# Altium PCB MTG_B_MAIN.PcbDoc (part 1 of 2)
Units mm, origin at the board's own origin, x right, y up, seen from the top; angles counter-clockwise.
Board outline 99.45 x 60.57 mm, 4 copper layers (Top Layer, Layer 1, Layer 2, Bottom Layer), stack 1.544 mm thick; 115 components, 96 nets, 460 pads, 131 vias.
Unrouted connection lines stored in the file: 2.
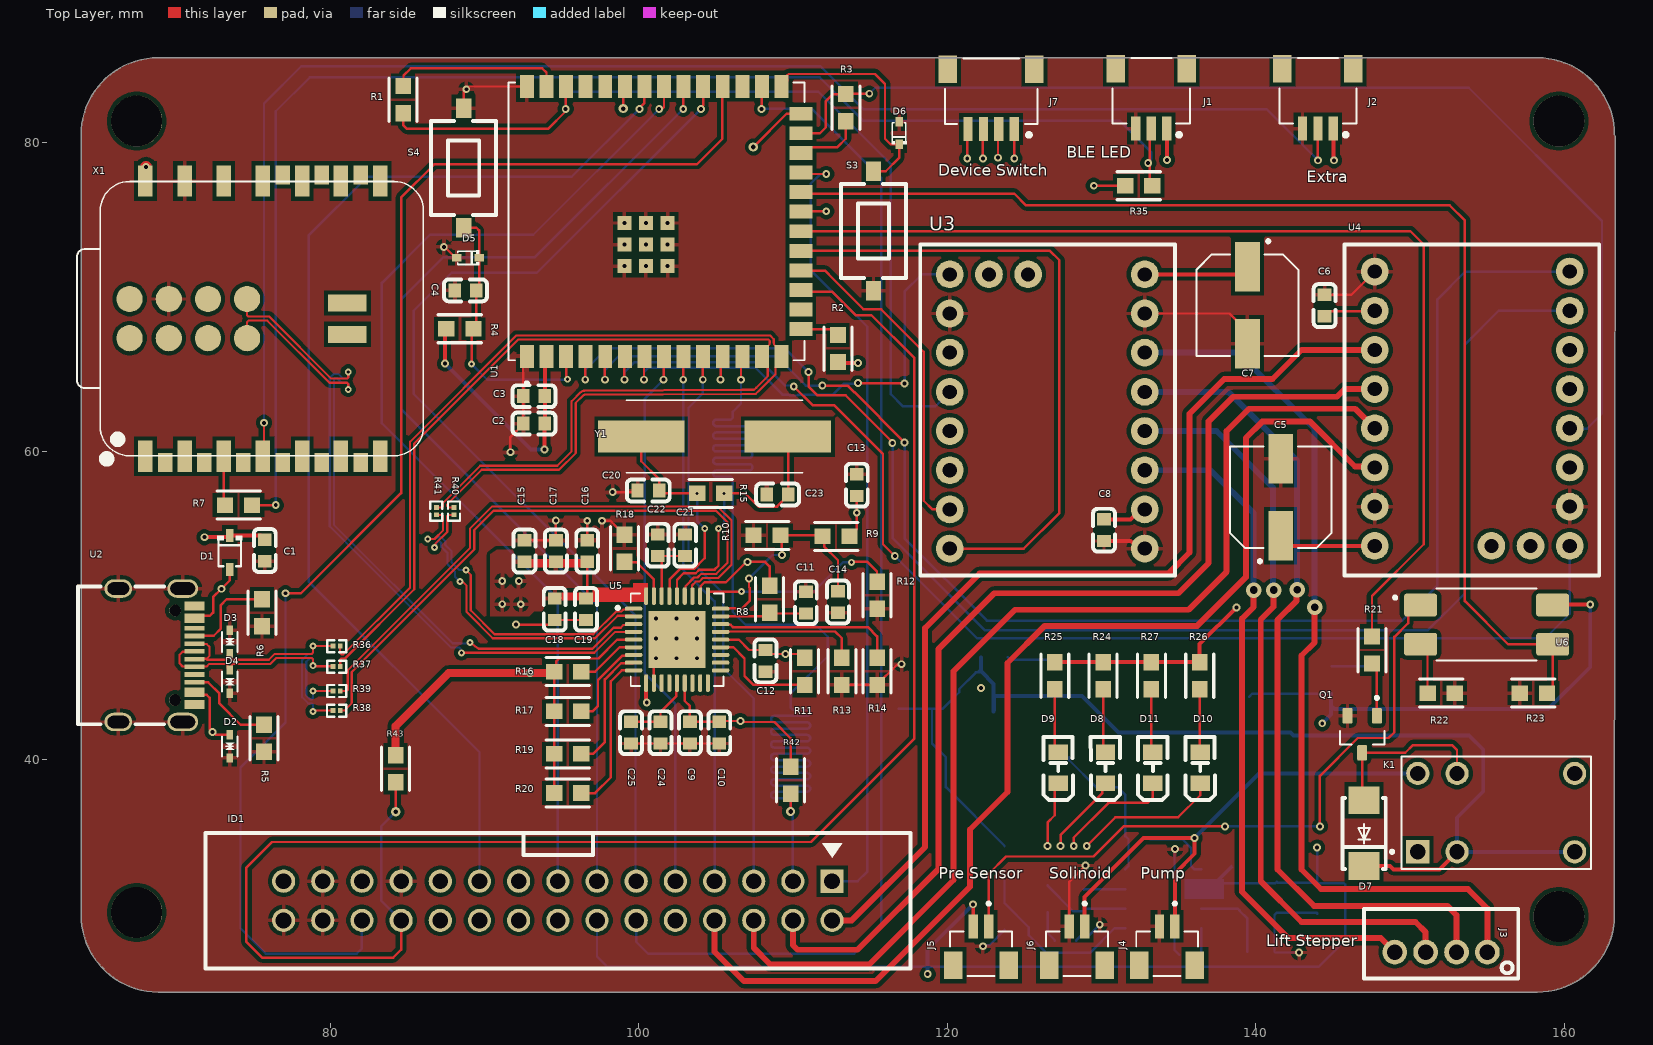
[diagram p0: Top Layer view]
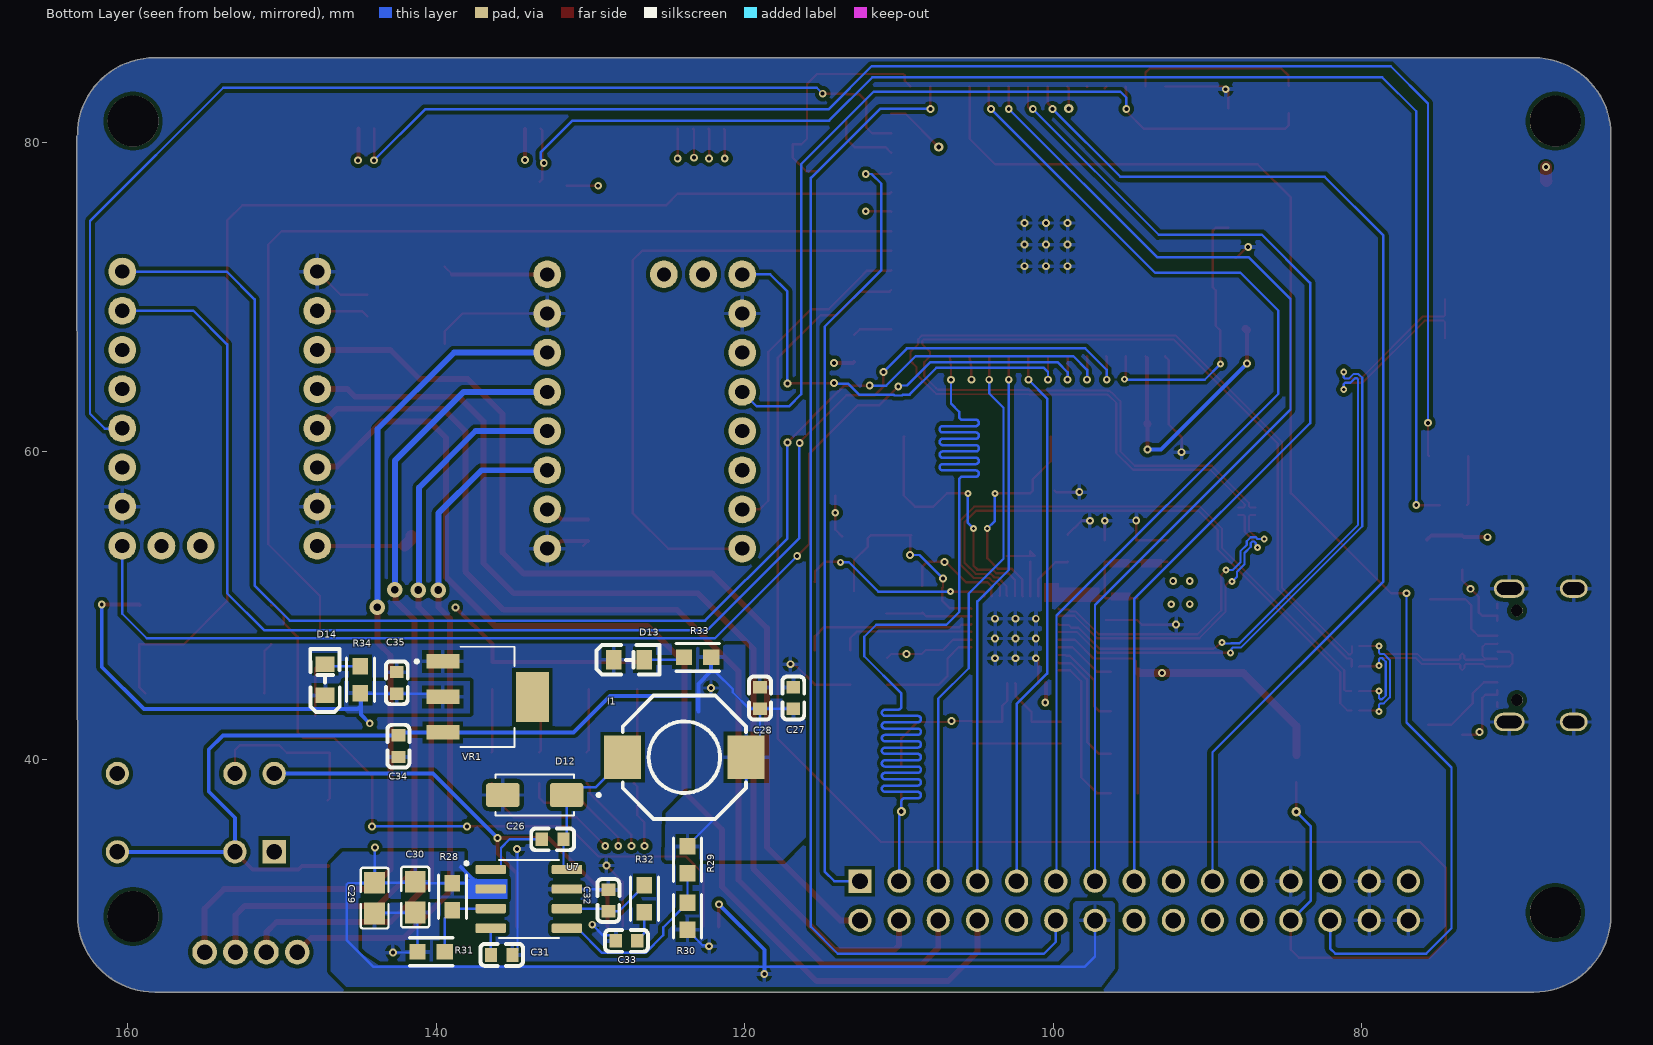
[diagram p1: Bottom Layer view, seen from below]
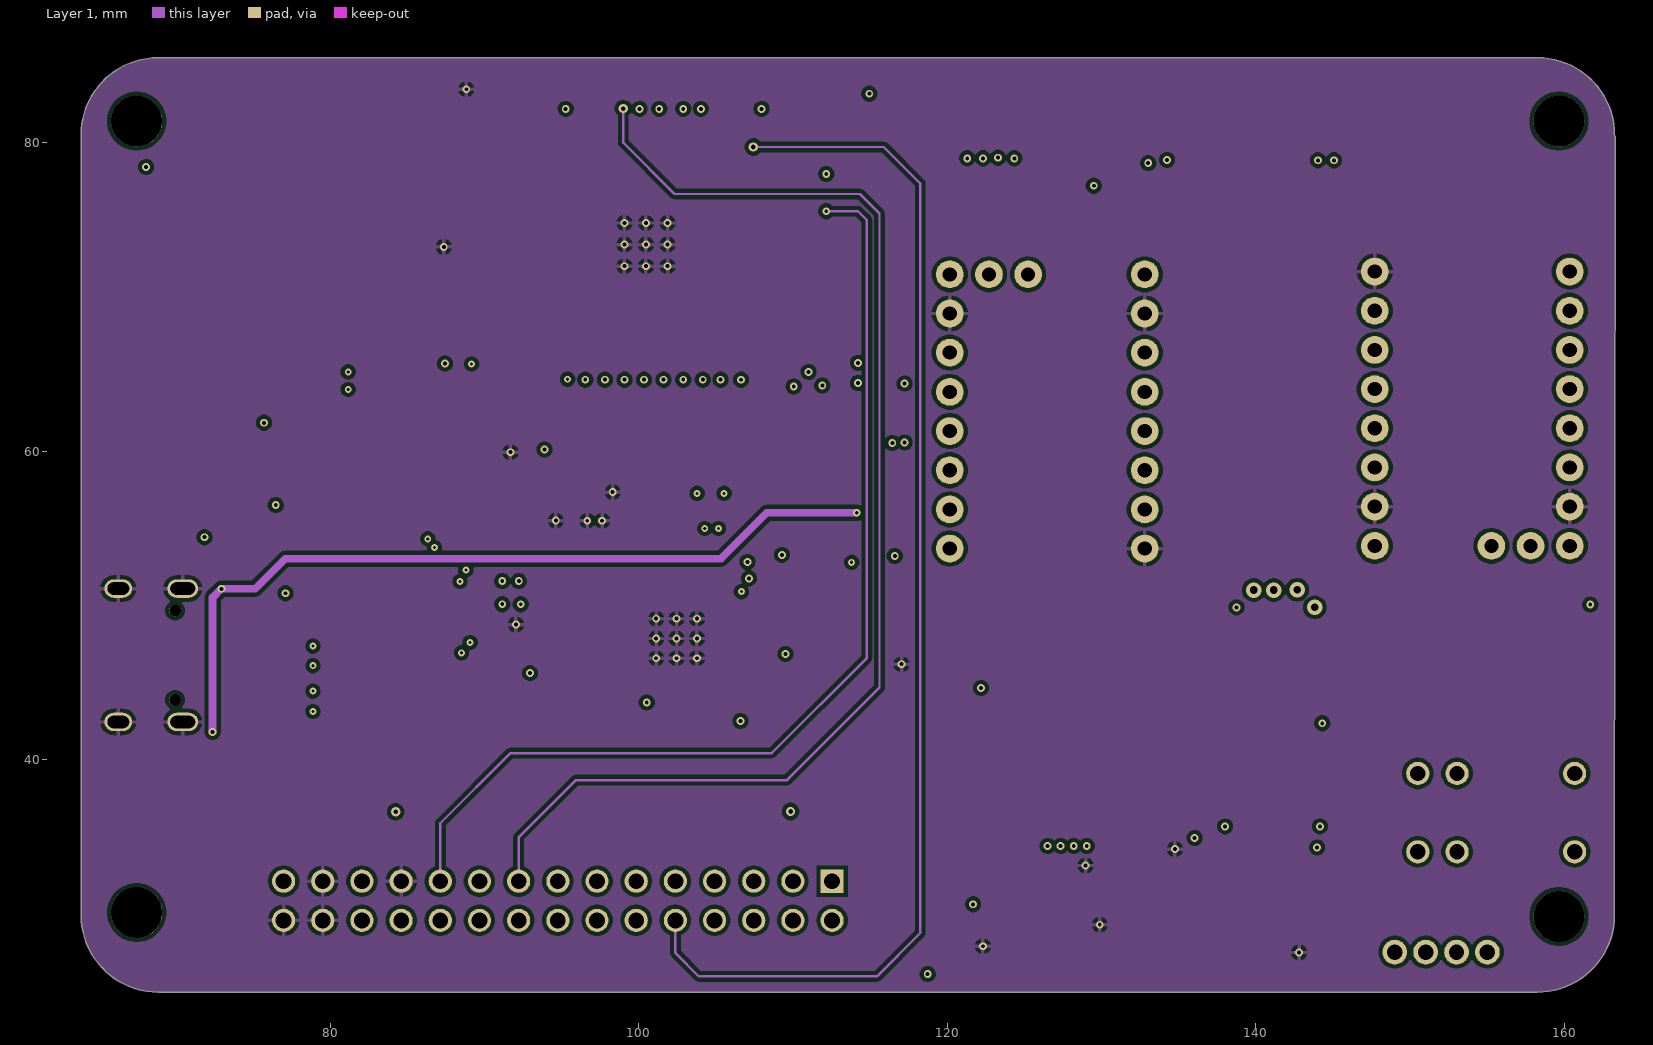
[diagram p2: Layer 1]
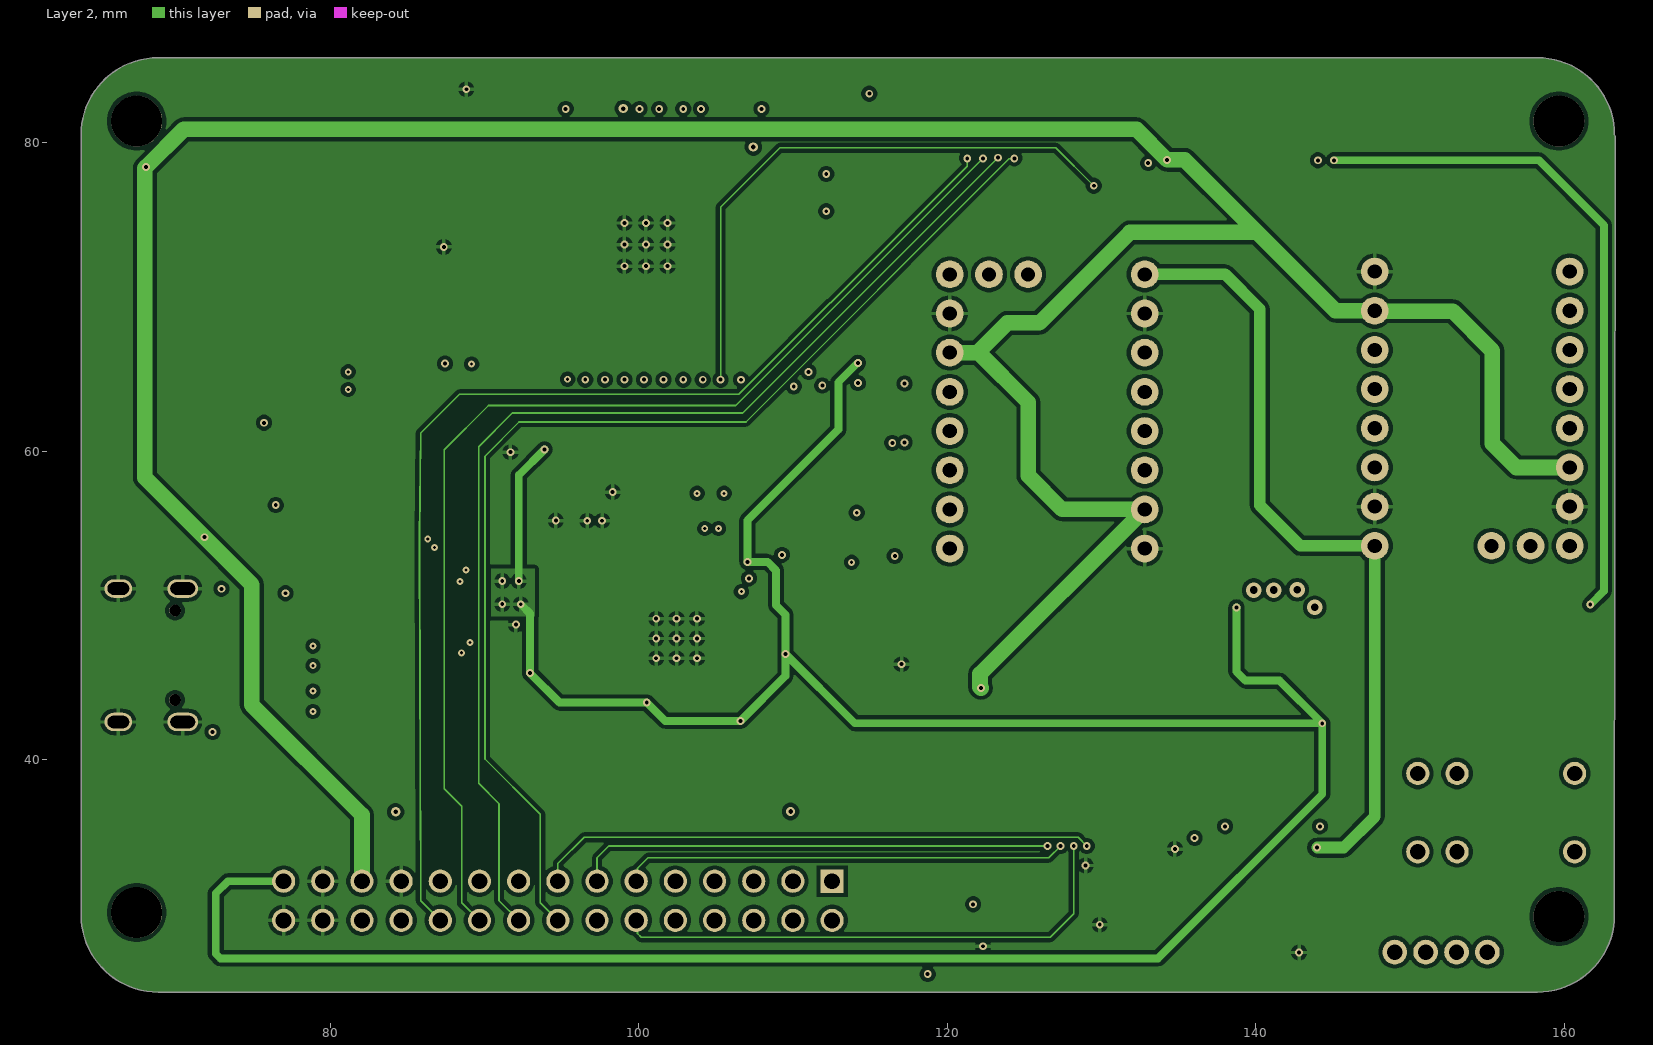
[diagram p3: Layer 2]
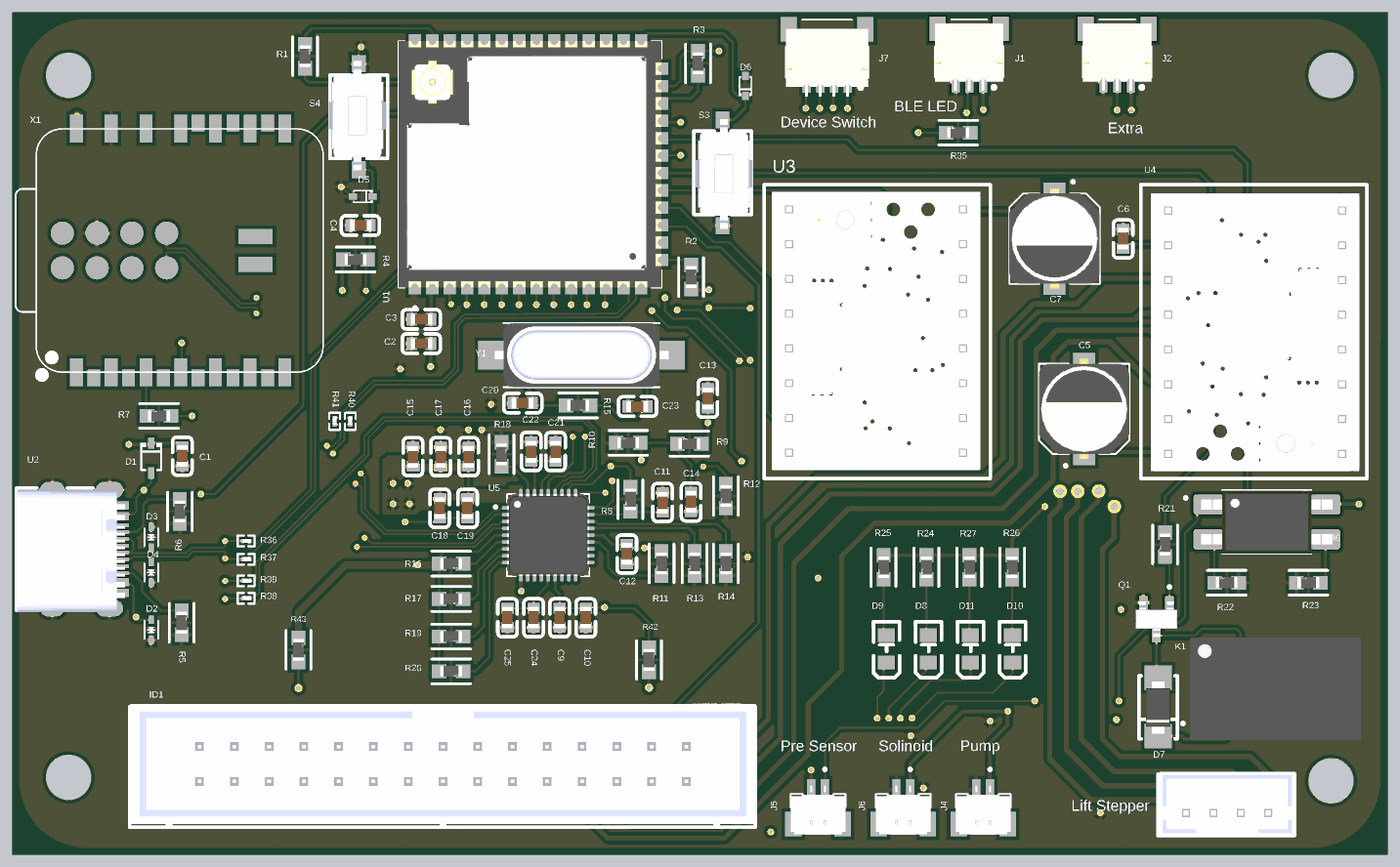
[diagram p5: 3D render of the assembled board from above, using the file's embedded part models]
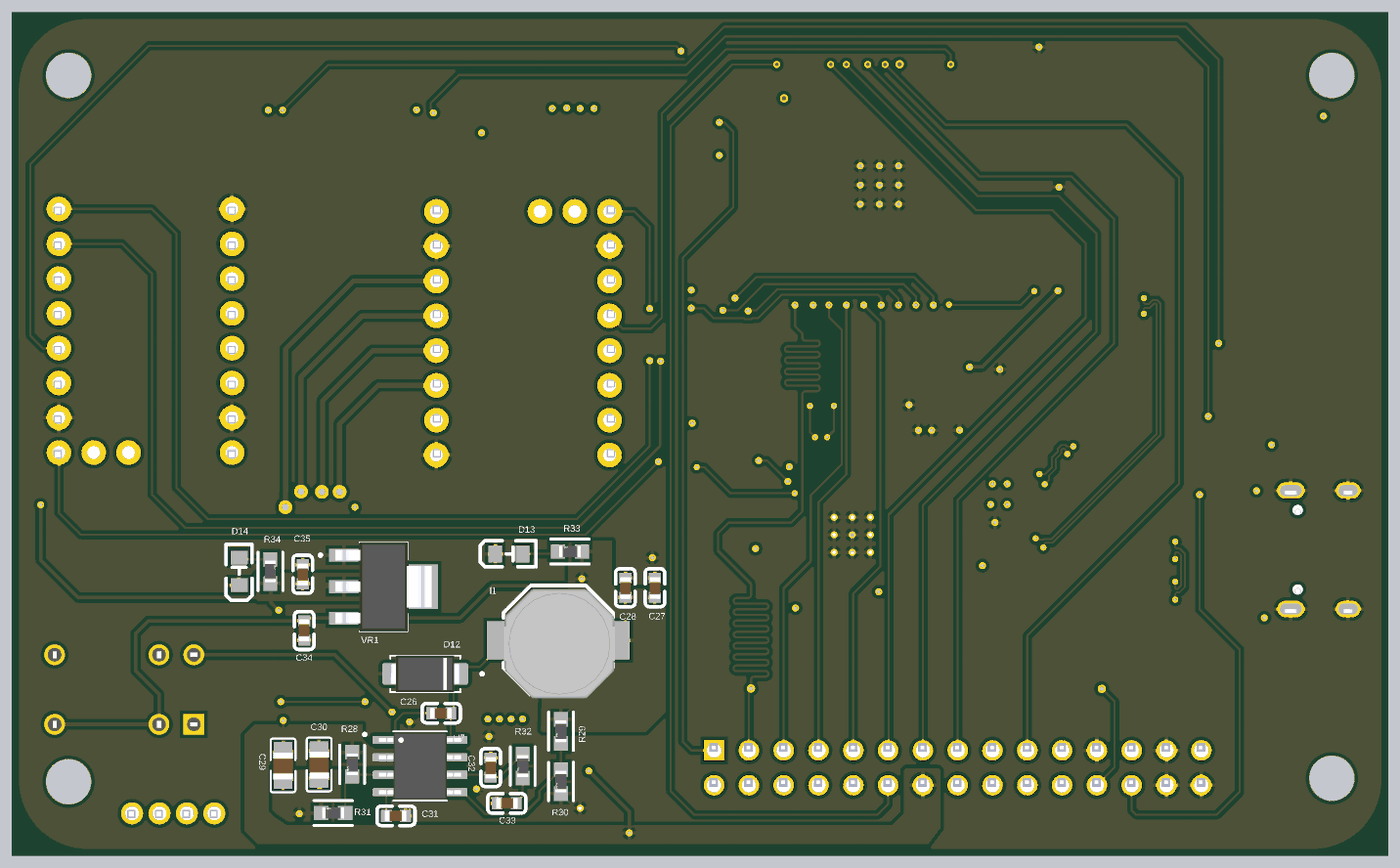
[diagram p6: 3D render of the assembled board from below, using the file's embedded part models]

## Layer stack, top to bottom
Top Solder: solder mask 0.0102, Solder Resist, Dk 3.5
Top Layer: signal copper 0.035
Dielectric 2: prepreg 0.092, PP-006, Dk 4.1
Layer 1: signal copper 0.03
Dielectric 1: dielectric 1.23, FR-4, Dk 4.8
Layer 2: signal copper 0.03
Dielectric 3: prepreg 0.092, PP-006, Dk 4.1
Bottom Layer: signal copper 0.035
Bottom Solder: solder mask 0.0102, Solder Resist, Dk 3.5

## Board outline
63.834,29.948 63.834,80.518 cw(c68.834,80.518) 68.834,85.518 158.242,85.518 cw(c158.242,80.518) 163.242,80.518 163.282,80.403 163.242,29.948 cw(c158.242,29.948) 158.242,24.948 68.834,24.948 cw(c68.834,29.948)

## Design rules (kind name [scope] priority, off if disabled: settings)
Clearance [All] p1: gap=0.254 ignorepadtopadclearanceinfootprint=FALSE except(0.127: Arc-Arc Arc-Track Track-Track)
DiffPairsRouting [InDifferentialPairClass('All Differential Pairs')] p1: maxlimit=0.127 minlimit=0.127 mostfreqgap=0.127 toplayer_minwidth=0.139 toplayer_maxwidth=0.139 toplayer_prefwidth=0.139 midlayer1_minwidth=0.078 midlayer1_maxwidth=0.078 midlayer1_prefwidth=0.078 midlayer2_minwidth=0.078 midlayer2_maxwidth=0.078 midlayer2_prefwidth=0.078 bottomlayer_minwidth=0.139 bottomlayer_maxwidth=0.139 bottomlayer_prefwidth=0.139 impedanceprofiledriven=TRUE impedanceprofileid={293B1E48-94D4-45EC-9236-5D6FF2A33685} impedanceprofilevalue=90.000000 maxuncoupledlength=12.7
MatchedLengths [InNetClass('I2C')] p1: tolerance=0 checknetsindiffpair=FALSE checkdiffpairvsdiffpair=TRUE checkxsignals=TRUE checkothers=TRUE
PolygonConnect [All] p1: connectstyle=Relief reliefconductorwidth=0.254 reliefentries=4 polygonreliefangle="90 Angle" airgapwidth=0.254
RoutingVias [All] p1: holewidth=0.711 width=1.27 viastyle="Through Hole" minholewidth=0.711 minwidth=1.27 maxholewidth=0.711 maxwidth=1.27
SolderMaskExpansion [All] p1: expansion=0 istentingtop=FALSE
SupplyNets "Schematic Supply Nets_4" [InNet('3V3')] p1: voltage=0.000
SupplyNets "Schematic Supply Nets_3" [InNet('VBUS')] p2: voltage=0.000
SupplyNets "Schematic Supply Nets_2" [InNet('19V')] p3: voltage=0.000
SupplyNets "Schematic Supply Nets_1" [InNet('5V')] p4: voltage=0.000
SupplyNets "Schematic Supply Nets" [InNet('GND')] p5: voltage=0.000
Width [All] p1: maxlimit=1.27 minlimit=0.108 preferedwidth=0.156 toplayer_minwidth=0.156 midlayer1_prefwidth=0.108 midlayer2_prefwidth=0.108 bottomlayer_minwidth=0.156 impedanceprofiledriven=TRUE impedanceprofileid={4305EF1B-C4E3-4A6E-B89B-675A5CBEDAC7} impedanceprofilevalue=50.000000 minimp=50.000000 maximp=50.000000 favimp=50.000000 checkconnectedcopper=TRUE
29 further rules are at their usual default settings.

## Classes and differential pairs
net class I2C: SCL SDA
component class XIAO_S3: J1 J2 R7 R35 X1
component class USB_HUB: C9 C10 C11 C12 C13 C14 C15 C16 C17 C18 C19 C20 C21 C22 C23 C24 C25 R8 R9 R10 R11 R12 R13 R14 R15 R16 R17 R18 R19 R20 U5 Y1
component class REALY_AND_PRESSURE: D7 J4 J5 J6 K1 Q1 R21 R22 R23 U6
component class Power: C26 C27 C28 C29 C30 C31 C32 C33 C34 C35 D12 D13 D14 l1 R28 R29 R30 R31 R32 R33 R34 U7 VR1
component class MOTOR_DRIVERS: C5 C6 C7 C8 J3 U3 U4
component class ESP32: C1 C2 C3 C4 D1 D2 D3 D4 D5 D6 R1 R2 R3 R4 R5 R6 R36 R37 R38 R39 R40 R41 R42 R43 S3 S4 U1 U2
component class CONNECTORS: D8 D9 D10 D11 ID1 J7 R24 R25 R26 R27
differential pair ESP1_D: +ESP1_D_P -ESP1_D_N
differential pair X_D: +X_D_P -X_D_N
differential pair HUB_D: +HUB_D_P -HUB_D_N
differential pair ESP_D: +ESP_D_P -ESP_D_N
differential pair D: +D_P -D_N

## Components (designator, comment, footprint, x,y, rotation, side; value= is the part's Value field where it differs from the comment)
C1 "100nF" "CAP 0603" 75.819,53.594 r90 top
C2 "10uF" "CAP 0603" 93.218,61.722 r0 top
C3 "100nF" "CAP 0603" 93.218,63.5 r0 top
C4 "100nF" "CAP 0603" 88.773,70.358 r0 top
C5 "100uF" CAP_EEEFTH101XAP 141.605,57.023 r90 top
C6 "100nF" "CAP 0603" 144.526,69.469 r90 top
C7 "100uF" CAP_EEEFTH101XAP 139.446,69.469 r270 top
C8 "100nF" "CAP 0603" 130.073,54.864 r270 top
C9 "4.7uF" "CAP 0603" 103.378,41.783 r90 top
C10 "100nF" "CAP 0603" 105.283,41.783 r90 top
C11 "100nF" "CAP 0603" 110.744,50.165 r270 top
C12 "100nF" "CAP 0603" 108.279,46.442 r90 top
C13 "1uF" "CAP 0603" 114.046,57.785 r270 top
C14 "1nF" "CAP 0603" 112.978,50.249 r90 top
C15 "100nF" "CAP 0603" 92.508,53.51 r270 top
C16 "100nF" "CAP 0603" 96.572,53.51 r270 top
C17 "100nF" "CAP 0603" 94.54,53.51 r270 top
C18 "100nF" "CAP 0603" 94.615,49.784 r90 top
C19 "1uF" "CAP 0603" 96.647,49.784 r90 top
C20 "18uF" "CAP 0603" 100.584,57.531 r180 top
C21 "100nF" "CAP 0603" 102.922,53.891 r270 top
C22 "1uF" "CAP 0603" 101.144,53.891 r270 top
C23 "18uF" "CAP 0603" 108.966,57.277 r180 top
C24 "100nF" "CAP 0603" 101.473,41.783 r90 top
C25 "1uF" "CAP 0603" 99.568,41.783 r90 top
C26 "100nF" "CAP 0603" 132.461,34.925 r0 bottom
C27 "47uF" "CAP 0603" 116.915,43.985 r270 bottom
C28 "47uF" "CAP 0603" 119.074,43.982 r270 bottom
C29 "10uF" "CAP 0805" 144.018,30.988 r90 bottom
C30 "10uF" "CAP 0805" 141.387,31.055 r90 bottom
C31 "10nF" "CAP 0603" 135.763,27.432 r0 bottom
C32 "10pF" "CAP 0603" 128.905,30.861 r270 bottom
C33 "1nF" "CAP 0603" 127.635,28.194 r180 bottom
C34 "100nF" "CAP 0603" 142.367,40.906 r90 bottom
C35 "100nF" "CAP 0603" 142.621,44.97 r270 bottom
D1 "Diode" Dioad 73.533,53.467 r270 top
D2 "ESD" ESD 73.546,41.021 r270 top
D3 "ESD" ESD 73.406,47.498 r90 top
D4 "ESD" ESD 73.546,45.212 r270 top
D5 "SINGAL ESD" "Singal ESD" 88.773,72.517 r180 top
D6 "SINGAL ESD" "Singal ESD" 116.84,80.772 r90 top
D7 "Diode" "RELAY DIODE" 147.066,35.306 r90 top
D8 "LED" LED 130.154,39.207 r90 top
D9 "LED" LED 127.085,39.207 r90 top
D10 "LED" LED 136.293,39.207 r90 top
D11 "LED" LED 133.224,39.207 r90 top
D12 "B340A-E3/61T" DIOM5126X229N 133.604,37.719 r0 bottom
D13 "LED" LED 127.774,46.573 r180 bottom
D14 "LED" LED 147.284,44.914 r90 bottom
ID1 "IDC 24PIN CONNECTOR" "IDC 30 PIN" 94.741,32.094 r180 top
J1 "SM03B-SRSS-TB(LF)(SN)" JST_SM03B-SRSS-TB(LF)(SN) 133.214,80.924 r180 top
J2 "SM03B-SRSS-TB(LF)(SN)" JST_SM03B-SRSS-TB(LF)(SN) 144.018,80.924 r180 top
J3 "SM04B-SRSS-TB(LF)(SN)" CONN-TH_B4B-PH-K-S 152.002,27.537 r0 top
J4 "SM02B-SRSS-TB(LF)(SN)" JST_BM02B-SRSS-TB(LF)(SN) 134.239,27.432 r180 top
J5 "SM02B-SRSS-TB(LF)(SN)" JST_BM02B-SRSS-TB(LF)(SN) 122.174,27.432 r180 top
J6 "SM02B-SRSS-TB(LF)(SN)" JST_BM02B-SRSS-TB(LF)(SN) 128.397,27.432 r180 top
J7 "SM04B-SRSS-TB(LF)(SN)" JST_SM04B-SRSS-TB(LF)(SN) 122.833,80.899 r180 top
K1 "G5V-1_DC5" RELAY_G5V-1_DC5 155.575,36.576 r0 top
l1 "10uH" INDUCTOR 123.825,40.132 r180 bottom
Q1 "MMBT3904" TRANS_MMBT3904 146.887,41.656 r270 top
R1 "1K" "RES 0603" 84.709,82.804 r90 top
R2 "10K" "RES 0603" 112.903,66.663 r90 top
R3 "1K" "RES 0603" 113.411,82.284 r90 top
R4 "5.1K" "RES 0603" 88.392,67.945 r180 top
R5 "5.1K" "RES 0603" 75.692,41.402 r90 top
R6 "5.1K" "RES 0603" 75.565,49.53 r90 top
R7 "0R" "RES 0603" 74.041,56.515 r180 top
R8 "100K" "RES 0603" 108.47,50.419 r270 top
R9 "100K" "RES 0603" 112.776,54.483 r180 top
R10 "100K" "RES 0603" 108.305,54.547 r180 top
R11 "100K" "RES 0603" 110.744,45.732 r270 top
R12 "100K" "RES 0603" 115.443,50.661 r270 top
R13 "100K" "RES 0603" 113.157,45.732 r270 top
R14 "100K" "RES 0603" 115.443,45.732 r270 top
R15 "1M" "RES 0603" 104.648,57.277 r0 top
R16 "10K" "RES 0603" 95.377,45.72 r0 top
R17 "10K" "RES 0603" 95.377,43.138 r0 top
R18 "12K" "RES 0603" 99.06,53.709 r90 top
R19 "10K" "RES 0603" 95.377,40.386 r0 top
R20 "10K" "RES 0603" 95.377,37.846 r0 top
R21 "10K" "RES 0603" 147.522,47.117 r270 top
R22 "1K" "RES 0603" 152.019,44.323 r180 top
R23 "10K" "RES 0603" 157.988,44.323 r180 top
R24 "220R" "RES 0603" 130.09,45.454 r270 top
R25 "220R" "RES 0603" 126.958,45.454 r270 top
R26 "220R" "RES 0603" 136.356,45.454 r270 top
R27 "220R" "RES 0603" 133.223,45.454 r270 top
R28 "169K" "RES 0603" 138.938,31.115 r270 bottom
R29 "10.2K" "RES 0603" 123.698,33.528 r270 bottom
R30 "1.96K" "RES 0603" 123.698,29.857 r270 bottom
R31 "22.6K" "RES 0603" 140.323,27.559 r0 bottom
R32 "32.4K" "RES 0603" 126.492,30.988 r270 bottom
R33 "470R" "RES 0603" 123.043,46.646 r0 bottom
R34 "220R" "RES 0603" 144.907,45.2 r90 bottom
R35 "0R" "RES 0603" 132.41,77.216 r180 top
R36 "0R" RES_0201 80.391,47.361 r0 top
R37 "0R" RES_0201 80.391,46.026 r0 top
R38 "0R" RES_0201 80.391,43.18 r0 top
R39 "0R" RES_0201 80.391,44.45 r0 top
R40 "0R" RES_0201 88.021,56.109 r90 top
R41 "0R" RES_0201 86.878,56.109 r90 top
R42 "1K" "RES 0603" 109.83,38.684 r90 top
R43 "1K" "RES 0603" 84.226,39.421 r90 top
S3 "Push button" "TACTICAL SWITCH" 115.189,74.168 r90 top
S4 "Push button" "TACTICAL SWITCH" 88.646,78.486 r270 top
U1 "ESP32-S3-WROOM-1U-N8R2" XCVR_ESP32-S3-WROOM-1U-N8R2 101.144,74.903 r90 top
U2 "USB C" TYPE-C 67.691,46.863 r270 top
U3 "MOTOR DRIVER" "MOTOR DRIVER" 126.42,62.586 r0 top
U4 "MOTOR DRIVER" "MOTOR DRIVER" 154.072,62.763 r180 top
U5 "USB2514BI-AEZG" QFN50P600X600X100-37N 102.469,47.796 r0 top
U6 "PC817X4NIP1B" SOIC254P960X420-4N 154.952,48.764 r0 top
U7 "TPS54331DR" SOIC127P599X175-8N 133.985,30.988 r180 bottom
VR1 "LM1117IMPX-3.3/NOPB" VREG_LM1117IMPX-3.3/NOPB 136.652,44.081 r180 bottom
X1 "XIAO_S3_PLUS" XIAO_S3_PLUS 75.869,69.366 r180 top
Y1 "ABLS-24.000MHZ-B4-T" XTAL_ABLS-24.000MHZ-B4-T 104.902,60.96 r180 top

## Footprints (in the part's own frame and the unit in brackets; to place one, negate y for a bottom-side part, rotate by r counter-clockwise, add the part's x,y. Pads: shape width x height; smd on the part's side, far side on the other; paste and mask are expansions set on the pad)
"CAP 0603" [mm]
  rect 0.8x0.9 smd paste+0 mask+0.051: 1(-0.722,0.075) 2(0.678,0.075)
  silkscreen extent -1.41,-0.64 1.37,0.79, body extent -0.8,-0.32 0.8,0.48, height 0.78
"CAP 0805" [mm]
  rect 1.41x1.35 smd paste-100 mask+0.051: 1(-0.956,-0.036) 2(1.044,-0.036)
  silkscreen extent -1.92,-0.94 2.01,0.87, body extent -1,-0.76 1,0.69, height 1.26
CAP_EEEFTH101XAP [mm]
  rect 3.2x1.6 smd: 1(-2.5,0) 2(2.5,0)
  silkscreen extent -4.25,-3.3 3.3,3.3, body extent -3.65,-3.3 3.65,3.3, height 7.7
CONN-TH_B4B-PH-K-S [mm]
  round 1.6 hole 1: 1(3,0) 2(1,0) 3(-1,0) 4(-3,0)
  silkscreen extent -5,-1.7 5,2.8, body extent -4.9,-1.74 5,2.96, height 6.1
Dioad [mm]
  rect 0.845x0.455 smd paste+0 mask+0.051: 1(-1.066,-0.061) 2(1.129,-0.061)
  silkscreen extent -1.07,-0.86 0.91,0.74
DIOM5126X229N [mm]
  rrect25% 2.17x1.57 smd: A(2.065,0) C(-2.065,0)
  silkscreen extent -4.25,-1.33 2.55,1.33, body extent -2.55,-1.33 2.55,1.33, height 2.29
ESD [mm]
  rect 0.6x0.4 smd paste+0 mask+0.051: 1(-0.604,-0.07) 2(0.896,-0.07)
  silkscreen extent -0.5,-0.57 0.8,0.43
"IDC 30 PIN" [mm]
  rect 1.5x1.5 hole 1.02 paste-2539.97 mask+0.05: 1(-17.781,-0.037)
  round 1.5 hole 1.02 paste-2539.97 mask+0.05: 2(-17.781,2.503) 3(-15.241,-0.037) 4(-15.241,2.503) 5(-12.701,-0.037) 6(-12.701,2.503) 7(-10.161,-0.037) 8(-10.161,2.503) 9(-7.621,-0.037) 10(-7.621,2.503) 11(-5.081,-0.037) 12(-5.081,2.503) 13(-2.541,-0.037) 14(-2.541,2.503) 15(-0.001,-0.037) 16(-0.001,2.503) 17(2.539,-0.037) 18(2.539,2.503) 19(5.079,-0.037) 20(5.079,2.503) 21(7.619,-0.037) 22(7.619,2.503) 23(10.159,-0.037) 24(10.159,2.503) 25(12.699,-0.037) 26(12.699,2.503) 27(15.239,-0.037) 28(15.239,2.503) 29(17.779,-0.037) 30(17.779,2.503)
  silkscreen extent -22.85,-3.17 22.85,5.63, body extent -22.89,-3.39 22.81,5.52, height 9.6
INDUCTOR [mm]
  rect 2.4x2.8 smd paste+0 mask+0.051: 1(-4.073,0.038) 2(3.927,0.038)
  silkscreen extent -4.07,-3.96 3.93,4.04, body extent -4.03,-4.22 4.07,3.79, height 3.1
JST_BM02B-SRSS-TB(LF)(SN) [mm]
  rect 0.6x1.55 smd: 1(-0.5,-1.775) 2(0.5,-1.775)
  rect 1.2x1.8 smd: S1(-1.8,0.75) S2(1.8,0.75)
  silkscreen extent -2,-3.35 2,1.45, body extent -2,-2.1 2,1.5, height 4.25
JST_SM03B-SRSS-TB(LF)(SN) [mm]
  rect 0.6x1.55 smd paste+0 mask+0.102: 1(-1,0) 2(0,0) 3(1,0)
  rect 1.2x1.8 smd paste+0 mask+0.102: S1(-2.3,-3.875) S2(2.3,-3.875)
  silkscreen extent -2.5,-4.57 2.5,0.5, body extent -2.5,-4.28 2.5,0.67, height 2.92
JST_SM04B-SRSS-TB(LF)(SN) [mm]
  rect 0.6x1.55 smd: 1(-1.5,0) 2(-0.5,0) 3(0.5,0) 4(1.5,0)
  rect 1.2x1.8 smd: S1(-2.8,-3.875) S2(2.8,-3.875)
  silkscreen extent -3,-4.57 3,0.48, body extent -3,-3.9 3,1.05, height 2.93
LED [mm]
  rect 1x1.25 smd paste+0 mask+0.051: 1(-0.718,-0.091) 2(1.282,-0.091)
  silkscreen extent -1.82,-1.04 2.26,0.87
"MOTOR DRIVER" [mm]
  round 1.8 hole 0.914 paste-2539.97 mask+0.051: 1(6.371,-8.89) 2(6.371,-6.35) 3(6.371,-3.81) 4(6.371,-1.27) 5(6.371,1.27) 6(6.371,3.81) 7(6.371,6.35) 8(6.371,8.89) 9(-6.269,8.89) 10(-6.269,6.35) 11(-6.269,3.81) 12(-6.269,1.27) 13(-6.269,-1.27) 14(-6.269,-3.81) 15(-6.269,-6.35) 16(-6.269,-8.89) 17(-1.189,8.89) 18(-3.729,8.89)
  silkscreen extent -8.18,-10.64 8.33,10.82, body extent -7.64,-10.03 7.6,10.29, height 11.3
QFN50P600X600X100-37N [mm]
  rrect70% 1.13x0.26 smd: 1(-2.82,2) 2(-2.82,1.5) 3(-2.82,1) 4(-2.82,0.5) 5(-2.82,0) 6(-2.82,-0.5) 7(-2.82,-1) 8(-2.82,-1.5) 9(-2.82,-2) 19(2.82,-2) 20(2.82,-1.5) 21(2.82,-1) 22(2.82,-0.5) 23(2.82,0) 24(2.82,0.5) 25(2.82,1) 26(2.82,1.5) 27(2.82,2)
  rrect70% 0.26x1.13 smd: 10(-2,-2.82) 11(-1.5,-2.82) 12(-1,-2.82) 13(-0.5,-2.82) 14(0,-2.82) 15(0.5,-2.82) 16(1,-2.82) 17(1.5,-2.82) 18(2,-2.82) 28(2,2.82) 29(1.5,2.82) 30(1,2.82) 31(0.5,2.82) 32(0,2.82) 33(-0.5,2.82) 34(-1,2.82) 35(-1.5,2.82) 36(-2,2.82)
  rect 3.7x3.7 smd paste-0.677: 37(0,0)
  silkscreen extent -3.94,-3 3,3, body extent -3,-3 3,3, height 1
"RELAY DIODE" [mm]
  rect 1.8x2 smd paste+0 mask+0.05: 1(-2.188,0.054) 2(2.071,0.054)
  silkscreen extent -2.39,-1.35 2.21,1.45, body extent -2,-0.85 1.8,0.95, height 1.31
RELAY_G5V-1_DC5 [mm]
  rect 1.508x1.508 / inner round 1.508 / far side rect 1.508x1.508 hole 1: 1(-5.08,-2.54)
  round 1.508 hole 1: 2(-2.54,-2.54) 5(5.08,-2.54) 6(5.08,2.54) 9(-2.54,2.54) 10(-5.08,2.54)
  silkscreen extent -6.85,-3.65 6.15,3.65, body extent -6.25,-3.75 6.25,3.75, height 10
"RES 0603" [mm]
  rect 1.059x1.012 smd paste+0 mask+0: 1(-0.877,0) 2(0.877,0)
  silkscreen extent -1.41,-0.91 1.41,0.91, body extent -1.91,-1.01 1.91,1.01, height 0.25
RES_0201 [mm]
  rect 0.303x0.324 smd paste-100 mask+0.051: 1(-0.229,0.01) 2(0.254,0.01)
  silkscreen extent -0.61,-0.38 0.63,0.4, body extent -0.24,-0.13 0.36,0.17, height 0.24
"Singal ESD" [mil]
  rect 24x19 smd: 1(-34,-1) 2(23,-1)
  silkscreen extent -35,-20 20,18
SOIC127P599X175-8N [mm]
  rrect25% 1.97x0.6 smd: 1(-2.47,1.905) 2(-2.47,0.635) 3(-2.47,-0.635) 4(-2.47,-1.905) 5(2.47,-1.905) 6(2.47,-0.635) 7(2.47,0.635) 8(2.47,1.905)
  silkscreen extent -4.14,-2.52 1.95,2.52, body extent -3,-2.45 3,2.45, height 1.75
SOIC254P960X420-4N [mm]
  rrect25% 2.15x1.48 smd paste+0 mask+0.102: 1(-4.28,1.27) 2(-4.28,-1.27) 3(4.28,-1.27) 4(4.28,1.27)
  silkscreen extent -6.03,-2.33 3.25,2.33, body extent -4.8,-2.3 4.8,2.3, height 4.2
"TACTICAL SWITCH" [mm]
  rect 1.25x1 smd paste+0 mask+0.051: 1(-3.761,-0.015) 2(3.989,-0.015)
  silkscreen extent -2.94,-2.11 3.16,2.09, body extent -3.97,-2.21 4.03,1.99, height 2.55
TRANS_MMBT3904 [mm]
  rrect25% 1x0.65 smd paste+0 mask+0.102: 1(-1.2,0.95) 2(-1.2,-0.95) 3(1.2,0)
  silkscreen extent -2.46,-1.45 0.65,1.45, body extent -1.3,-1.52 1.3,1.52, height 1.3
TYPE-C [mm]
  oval 1.2x2 hole 0.8 slot 1.6 at 90 deg paste-2539.97 mask+0.051: 0(-4.241,2.736) 1(4.409,2.736)
  oval 1.2x1.8 hole 0.8 slot 1.4 at 90 deg paste-2539.97 mask+0.051: 2(4.409,-1.444) 3(-4.241,-1.444)
  rect 0.3x1.3 smd paste-100 mask+0.051: A1(-3.266,3.504) A4(-2.466,3.504) A5(-1.166,3.504) A6(-0.166,3.504) A7(0.334,3.504) A8(1.334,3.504) A9(2.634,3.504) A12(3.434,3.504) B1(3.134,3.504) B4(2.334,3.504) B5(1.834,3.504) B6(0.834,3.504) B7(-0.666,3.504) B8(-1.666,3.504) B9(-2.166,3.504) B12(-2.966,3.504)
  round 0.75 hole 0.75 unplated paste-2539.97: ""(-2.816,2.236) ""(2.984,2.236)
  silkscreen extent -4.38,-4.06 4.56,1.52, body extent -4.24,-4.02 4.7,3.88, height 3.3
VREG_LM1117IMPX-3.3/NOPB [mm]
  rect 2.15x0.95 smd: 1(-2.9,2.3) 2(-2.9,0) 3(-2.9,-2.3)
  rect 2.15x3.25 smd: 4(2.9,0)
  silkscreen extent -4.7,-3.25 1.75,3.25, body extent -3.5,-3.25 3.5,3.25, height 1.8
XCVR_ESP32-S3-WROOM-1U-N8R2 [mm]
  rect 1.5x0.9 smd: 1(-8.75,8.41) 2(-8.75,7.14) 3(-8.75,5.87) 4(-8.75,4.6) 5(-8.75,3.33) 6(-8.75,2.06) 7(-8.75,0.79) 8(-8.75,-0.48) 9(-8.75,-1.75) 10(-8.75,-3.02) 11(-8.75,-4.29) 12(-8.75,-5.56) 13(-8.75,-6.83) 14(-8.75,-8.1) 27(8.75,-8.1) 28(8.75,-6.83) 29(8.75,-5.56) 30(8.75,-4.29) 31(8.75,-3.02) 32(8.75,-1.75) 33(8.75,-0.48) 34(8.75,0.79) 35(8.75,2.06) 36(8.75,3.33) 37(8.75,4.6) 38(8.75,5.87) 39(8.75,7.14) 40(8.75,8.41)
  rect 0.9x1.5 smd: 15(-6.985,-9.35) 16(-5.715,-9.35) 17(-4.445,-9.35) 18(-3.175,-9.35) 19(-1.905,-9.35) 20(-0.635,-9.35) 21(0.635,-9.35) 22(1.905,-9.35) 23(3.175,-9.35) 24(4.445,-9.35) 25(5.715,-9.35) 26(6.985,-9.35)
  rect 0.9x0.9 smd: 41_1(-2.9,2.09) 41_2(-1.5,2.09) 41_3(-0.1,2.09) 41_4(-2.9,0.69) 41_5(-1.5,0.69) 41_6(-0.1,0.69) 41_7(-2.9,-0.71) 41_8(-1.5,-0.71) 41_9(-0.1,-0.71)
  silkscreen extent -10.6,-9.6 9,9.6, body extent -9,-9.6 9,9.6, height 3.35
XIAO_S3_PLUS [mil]
  rect 37x80 smd: 1(309.49,380.93) 2(209.49,380.93) 3(109.49,380.93) 4(9.49,380.93) 5(-90.51,380.93) 6(-189.51,380.93) 7(-289.51,380.93) 8(-289.51,-321.07) 9(-189.51,-321.07) 10(-90.51,-321.07) 11(9.49,-321.07) 12(109.49,-321.07) 13(209.49,-321.07) 14(309.49,-321.07)
  rect 37x48.5 smd: 15(259.49,396.67) 16(159.49,396.67) 17(59.49,396.67) 18(-40.51,396.67) 19(-140.51,396.67) 20(-240.51,396.67) 21(-240.51,-336.82) 22(-140.51,-336.82) 23(-40.51,-336.82)
  round 66.93 smd paste+0 mask+2: 24(350,80) 25(350,-20) 26(250,80) 27(250,-20) 28(150,80) 29(150,-20) 30(50,80) 31(50,-20)
  rect 98.43x43.31 smd: 32(-206,70) 33(-206,-10)
  silkscreen extent -400,-320 484,398
XTAL_ABLS-24.000MHZ-B4-T [mm]
  rect 5.6x2.1 smd: 1(-4.75,0) 2(4.75,0)
  silkscreen extent -5.7,-2.35 5.7,2.35, body extent -6.35,-2.35 6.35,2.35, height 4.2

## Part data
C1 C3 C4 C6 C8 C10 C11 C12 C15 C16 C17 C18 C21 C24 C26 C34 C35: library part Capasitor, Manufacture=YAGEO, Part Number=CC0603JRX7R9BB104, Supplier Part Number=C91183, ComponentLink1Description="New link", Footprint size=0603, Supplier=LCSC
  C1 C3 C4 C6 C8 C26 C34 C35: Link=https://www.lcsc.com/product-detail/C91183.html
  C10 C11 C12 C15 C16 C17 C18 C21 C24: Link=https://www.lcsc.com/product-detail/C91183.html?spm=wm.fly.bg.0.xh&lcsc_vid=RFYMBlMFQAQLUVJeFVJZXwVeRFYIAgBXEVkPUlxRRVUxVlNRQFNZUlZTRldbXzsOAxUeFF5JWBYZEEoKFBINSQcJGk4NBhADEA4cHktXRlVcSQwSGg0%3D
C2: library part Capasitor, Manufacture=YAGEO, Part Number=CC0603KRX5R5BB106, Supplier Part Number=C109455, ComponentLink1Description="New link", Footprint size=0603, Link=https://www.lcsc.com/product-detail/C109455.html, Supplier=LCSC
C5 C7: library part EEEFTH101XAP, "100ÂµF 50V Aluminum Electrolytic Capacitors Radial, Can - SMD 340mOhm @ 100kHz 2000 Hrs @ 105Â°C", Manufacture=PANASONIC, Supplier Part Number=C165974, Footprint size=SMD,D6.3xL7.7mm, Link=https://www.lcsc.com/product-detail/C165974.html?spm=wm.fly.bg.0.xh___wm.fly.tp.1.ml&lcsc_vid=RFYMBlMFQAQLUVJeFVJZXwVeRFYIAgBXEVkPUlxRRVUxVlNRQVleUVNURlVfUDsOAxUeFF5JWBYZEEoKFBINSQcJGk4NBhADEA4cHktXRlVcSQwSGg0%3D, Part Number=EEEFTH101XAP, Supplier=LCSC
C9: library part Capasitor, Manufacture="Samsung Electro-Mechanics", Part Number=CL10A475KL8NRNC, Supplier Part Number=C307467, ComponentLink1Description="New link", Footprint size=0603, Link=https://www.lcsc.com/product-detail/C307467.html?spm=wm.fly.bg.0.xh&lcsc_vid=RFYMBlMFQAQLUVJeFVJZXwVeRFYIAgBXEVkPUlxRRVUxVlNRQFNWU1xXQ1FYVTsOAxUeFF5JWBYZEEoKFBINSQcJGk4NBhADEA4cHktXRlVcSQwSGg0%3D, Supplier=LCSC
C13 C19 C22 C25: library part Capasitor, Manufacture=YAGEO, Part Number=CC0603JRX7R7BB105, Supplier Part Number=C519560, ComponentLink1Description="New link", Footprint size=0603, Link=https://www.lcsc.com/product-detail/C519560.html?spm=wm.fly.bg.0.xh___wm.mly.mlk.28-0-4.ml&lcsc_vid=RFYMBlMFQAQLUVJeFVJZXwVeRFYIAgBXEVkPUlxRRVUxVlNRQFNYUlFWRVddVTsOAxUeFF5JWBYZEEoKFBINSQcJGk4dAgUUFAk%3D, Supplier=LCSC
C14: library part Capasitor, Manufacture=muRata, Part Number=GRM1885C1H102JA01D, Supplier Part Number=C77026, ComponentLink1Description="New link", Footprint size=0603, Link=https://www.lcsc.com/product-detail/C77026.html?spm=wm.fly.bg.0.xh&lcsc_vid=RFYMBlMFQAQLUVJeFVJZXwVeRFYIAgBXEVkPUlxRRVUxVlNRQFNZU1RTQVldUTsOAxUeFF5JWBYZEEoKFBINSQcJGk4NBhADEA4cHktXRlVcSQwSGg0%3D, Supplier=LCSC
C20 C23: library part Capasitor, Manufacture=YAGEO, Part Number=CC0603FRNPO9BN180, Supplier Part Number=C527046, ComponentLink1Description="New link", Footprint size=0603, Link=https://www.lcsc.com/product-detail/C527046.html?spm=wm.fly.bg.0.xh&lcsc_vid=RFYMBlMFQAQLUVJeFVJZXwVeRFYIAgBXEVkPUlxRRVUxVlNRQFNZUFBXRFNZUTsOAxUeFF5JWBYZEEoKFBINSQcJGk4NBhADEA4cHktXRlVcSQwSGg0%3D, Supplier=LCSC
C27 C28: library part Capasitor, Manufacture=muRata, Part Number=GRM188R60J476ME15D, Supplier Part Number=C140782, ComponentLink1Description="New link", Footprint size=0603, Link=https://www.lcsc.com/product-detail/C140782.html?spm=wm.fly.bg.0.xh&lcsc_vid=EwNbUgICTlRcBlxXEQRYAgYAFVkLVwZURVRZBVcDFVcxVlNRQVZbUlVUQ1BaVDsOAxUeFF5JWBYZEEoKFBINSQcJGk4NBhADEA4cHktXRlVcSQwSGg0%3D, Supplier=LCSC
C29 C30: library part Capasitor, Manufacture=muRata, Part Number=GRM21BR61H106KE43L, Supplier Part Number=C440198, ComponentLink1Description="New link", Footprint size=0805, Link=https://www.lcsc.com/product-detail/C440198.html?spm=wm.fly.bg.0.xh___wm.sy.dhl.mly.12-0-4&lcsc_vid=EwNbUgICTlRcBlxXEQRYAgYAFVkLVwZURVRZBVcDFVcxVlNRQVZbVl1eT1ddXzsOAxUeFF5JWBYZEEoBGA4JCwFIFA4DSA%3D%3D, Supplier=LCSC
C31: library part Capasitor, Manufacture=YAGEO, Part Number=CC0603JRX7R9BB103, Supplier Part Number=C115056, ComponentLink1Description="New link", Footprint size=0603, Link=https://www.lcsc.com/product-detail/C115056.html?spm=wm.fly.bg.0.xh___wm.sxq.ssx.dcs.1&lcsc_vid=EwNbUgICTlRcBlxXEQRYAgYAFVkLVwZURVRZBVcDFVcxVlNRQVZbVV1VQ1VZVTsOAxUeFF5JWBYZEEoKFBINSQcJGk4NBhADEA4cHktXRlVcSQwSGg0%3D, Supplier=LCSC
C32: library part Capasitor, Manufacture=muRata, Part Number=GRM1885C1H100FA01D, Supplier Part Number=C162202, ComponentLink1Description="New link", Footprint size=0603, Link=https://www.lcsc.com/product-detail/C162202.html?spm=wm.fly.bg.0.xh&lcsc_vid=EwNbUgICTlRcBlxXEQRYAgYAFVkLVwZURVRZBVcDFVcxVlNRQVZbU11QRVlbVzsOAxUeFF5JWBYZEEoKFBINSQcJGk4NBhADEA4cHktXRlVcSQwSGg0%3D, Supplier=LCSC
C33: library part Capasitor, Manufacture=muRata, Part Number=GRM1885C1H102FA01D, Supplier Part Number=C913702, ComponentLink1Description="New link", Footprint size=0603, Link=https://www.lcsc.com/product-detail/C913702.html?spm=wm.fly.bg.0.xh&lcsc_vid=EwNbUgICTlRcBlxXEQRYAgYAFVkLVwZURVRZBVcDFVcxVlNRQVZbU1xWRlhcUDsOAxUeFF5JWBYZEEoKFBINSQcJGk4NBhADEA4cHktXRlVcSQwSGg0%3D, Supplier=LCSC
D1: Manufacture="Guangdong Hottech", Part Number=1N5819WS, Supplier Part Number=C191023, Footprint size=SOD-323, Link=https://www.lcsc.com/product-detail/C191023.html?s_z=n_1N5819WS, Supplier=LCSC
D2 D3 D4: Manufacture=UMW, Part Number=LESD5D5.0CT1G(UMW), Supplier Part Number=C5199850, Footprint size=SOD-523, Link=https://www.lcsc.com/product-detail/C5199850.html?s_z=n_LESD5D5.0CT1G, Supplier=LCSC
D5 D6: Manufacture=onsemi, Part Number=ESD5Z3.3T1G, Supplier Part Number=C61148, Footprint size=SOD-523, Link=https://www.lcsc.com/product-detail/C61148.html?s_z=n_ESD5Z3.3T1G, Supplier=LCSC
D7: Manufacture=YONGYUTAI, Part Number=1N4002, Supplier Part Number=C3038772, Footprint size=SMA, Link=https://www.lcsc.com/product-detail/C3038772.html?s_z=n_q_C3038772, Supplier=LCSC
D8 D9 D10 D11 D13 D14: Manufacture=XINGLIGHT, Part Number=XL-2012SURC, Supplier Part Number=C965812, ComponentLink1Description="New link", Footprint size=0805, Link=https://www.lcsc.com/product-detail/C965812.html?s_z=n_XL-2012SURC, Supplier=LCSC
D12: "Diode Schottky 40 V 3A Surface Mount DO-214AC (SMA)", Manufacture=VISHAY, Supplier Part Number=C15570, Footprint size=SMA(DO-214AC), Link=https://www.lcsc.com/product-detail/C15570.html?s_z=n_q_B340A-E3%252F61T&spm=wm.ssy.bg.0.xh&lcsc_vid=RFYMBlMFQAQLUVJeFVJZXwVeRFYIAgBXEVkPUlxRRVUxVlNRQVZaVFVTRFJeXzsOAxUeFF5JWBYZEEoKFBINSQcJGk4%3D, Part Number=B340A-E3/61T, Supplier=LCSC
ID1: Manufacture=Megastar, Part Number=ZX-IDC2.54-2-15PZZ, Supplier Part Number=C7501248, Footprint size="Through Hole,P=2.54mm", Link=https://www.lcsc.com/product-detail/C7501248.html?spm=wm.fly.bg.1.xh___wm.sxq.ssx.dcs.1&lcsc_vid=RFYMBlMFQAQLUVJeFVJZXwVeRFYIAgBXEVkPUlxRRVUxVlNRQFRdUlNRR1daVzsOAxUeFF5JWBYZEEoBGA4JCwFIFA4DSA%3D%3D, Supplier=LCSC
J1 J2: "Connector Header Surface Mount, Right Angle 3 position 0.039 (1.00mm)", Manufacture=JST, Supplier Part Number=C160403, Footprint size="SMD,P=1mm,Surface Mount,Right Angle", Part Number=SM03B-SRSS-TB(LF)(SN), Supplier=LCSC
  J1: Link=https://www.lcsc.com/product-detail/C160403.html?s_z=n_q_SM03B-SRSS-TB%2520%28LF%29%28SN%29&spm=wm.ssy.bg.0.xh&lcsc_vid=RFYMBlMFQAQLUVJeFVJZXwVeRFYIAgBXEVkPUlxRRVUxVlNRT1FYV1xXRVRYUjsOAxUeFF5JWBYZEEoKFBINSQcJGk4eFQsCAgIaSgADAwAHC0slRldeVFFSWQkaCgg%3D
  J2: Link=https://www.lcsc.com/product-detail/C160403.html?s_z=n_q_SM03B-SRSS-TB%2520%28LF%29%28SN%29&spm=wm.ssy.bg.0.xh&lcsc_vid=RFYMBlMFQAQLUVJeFVJZXwVeRFYIAgBXEVkPUlxRRVUxVlNRT1FbVVBSRFBeUjsOAxUeFF5JWBYZEEoKFBINSQcJGk4%3D
J3: "Connector Header Surface Mount, Right Angle 4 position 0.039 (1.00mm)", Manufacture=JST, Part Number=B4B-PH-K-S(LF)(SN), Supplier Part Number=C131334, Footprint size="Through Hole,P=2mm", Link=https://www.lcsc.com/product-detail/C131334.html?spm=wm.fly.bg.0.xh___wm.sxq.ssx.dcs.1&lcsc_vid=RFYMBlMFQAQLUVJeFVJZXwVeRFYIAgBXEVkPUlxRRVUxVlNRT1FbVVBSRFBeUjsOAxUeFF5JWBYZEEoKFBINSQcJGk4%3D, Supplier=LCSC
J4 J5 J6: "Connector Header Surface Mount, Right Angle 2 position 0.039 (1.00mm)", Manufacture=JST, Part Number=BM02B-SRSS-TB(LF)(SN), Supplier Part Number=C160388, Footprint size=SMD,P=1mm, Link=https://www.lcsc.com/product-detail/C160388.html?s_z=n_q_BM02B-SRSS-TB%2520%28LF%29%28SN%29&spm=wm.ssy.bg.0.xh&lcsc_vid=RFYMBlMFQAQLUVJeFVJZXwVeRFYIAgBXEVkPUlxRRVUxVlNRQFVaV1JfRVBbXjsOAxUeFF5JWBYZEEoKFBINSQcJGk4%3D, Supplier=LCSC
J7: "Connector Header Surface Mount, Right Angle 4 position 0.039 (1.00mm)", Manufacture=JST, Supplier Part Number=C160404, Footprint size="SMD,P=1mm,Surface Mount,Right Angle", Link=https://www.lcsc.com/product-detail/C160404.html?s_z=n_q_SM04B-SRSS-TB%28LF%29%28SN%29&spm=wm.ssy.bg.0.xh&lcsc_vid=RFYMBlMFQAQLUVJeFVJZXwVeRFYIAgBXEVkPUlxRRVUxVlNRQVlZVVBSQVVXUzsOAxUeFF5JWBYZEEoKFBINSQcJGk4%3D, Part Number=SM04B-SRSS-TB(LF)(SN), Supplier=LCSC
K1: "General Purpose Relay SPDT (1 Form C) Through Hole", Manufacture=OMRON, Part Number="G5V-1 DC5", Supplier Part Number=C28695, Footprint size=DIP,12.5x7.5mm, Link=https://www.lcsc.com/product-detail/C28695.html?s_z=n_q_G5V-1%2520DC5&spm=wm.fly.bg.0.xh&lcsc_vid=RFYMBlMFQAQLUVJeFVJZXwVeRFYIAgBXEVkPUlxRRVUxVlNRT1BZUVdRTldWVDsOAxUeFF5JWBYZEEoKFBINSQcJGk4eFQsCAgIaSgADAwAHC0slRVFbVVJIHxUDCw%3D%3D, Supplier=LCSC
l1: library part Iductor, Manufacture=YJYCOIN, Part Number=YPRH8D43-100M, Supplier Part Number=C338825, ComponentLink1Description="New link", Footprint size=SMD,8x8mm, Link=https://www.lcsc.com/product-detail/C338825.html?spm=wm.fly.bg.0.xh___wm.sy.top.tjl.8-42&lcsc_vid=EwNbUgICTlRcBlxXEQRYAgYAFVkLVwZURVRZBVcDFVcxVlNRQVZaUFVXRFFYXzsOAxUeFF5JWBYZEEoBGA4JCwFIFA4DSA%3D%3D, Supplier=LCSC
Q1: "BJT, SOT-23, 40V, 200mA, NPN, 0.35W, 150Â°C", Manufacture=JSCJ, Part Number=MMBT3904(RANGE:100-300), Supplier Part Number=C20526, Footprint size=SOT-23, Link=https://www.lcsc.com/product-detail/C20526.html?s_z=n_q_C20526&globalKeyword=C20526, Supplier=LCSC
R1 R3: library part Resistor, Manufacture=RESI, Part Number=AECR0603F1K00K9, Supplier Part Number=C328340, ComponentLink1Description="New link", Footprint size=0603, Link=https://www.lcsc.com/product-detail/C328340.html?spm=wm.fly.bg.0.xh&lcsc_vid=RFYMBlMFQAQLUVJeFVJZXwVeRFYIAgBXEVkPUlxRRVUxVlNRQFNWUFJUQFldUjsOAxUeFF5JWBYZEEoKFBINSQcJGk4eFQsCAgIaSgADAwAHC0slQllXU1RIHxUDCw%3D%3D, Supplier=LCSC
R2: library part "R NEW", Manufacture=YAGEO, Part Number=RC0603JR-0710KL, Supplier Part Number=C99198, ComponentLink1Description="New link", Footprint size=0603, Link=https://www.lcsc.com/product-detail/C99198.html, Supplier=LCSC
R4 R5 R6: library part "R NEW", Manufacture=YAGEO, Part Number=RC0603JR-075K1L, Supplier Part Number=C14677, ComponentLink1Description="New link", Footprint size=0603, Link=https://www.lcsc.com/product-detail/C14677.html, Supplier=LCSC
R7 R35: library part Resistor, Manufacture=YAGEO, Part Number=RC0603JR-070RL, Supplier Part Number=C95177, ComponentLink1Description="New link", Footprint size=0603, Link=https://www.lcsc.com/product-detail/C95177.html?spm=wm.fly.bg.0.xh___wm.sy.top.tjl.8-58&lcsc_vid=EwNbUgICTlRcBlxXEQRYAgYAFVkLVwZURVRZBVcDFVcxVlNRQVhdXlVXT1hfVjsOAxUeFF5JWBYZEEoBGA4JCwFIFA4DSA%3D%3D, Supplier=LCSC
R8 R9 R10 R11 R12 R13 R14: library part Resistor, Manufacture=FH, Part Number=RS-03K104JT, Supplier Part Number=C73806, ComponentLink1Description="New link", Footprint size=0603, Link=https://www.lcsc.com/product-detail/C73806.html?spm=wm.fly.bg.0.xh___wm.mly.mlk.28-6-1.ml&lcsc_vid=RFYMBlMFQAQLUVJeFVJZXwVeRFYIAgBXEVkPUlxRRVUxVlNRQFNYUVZQRlheVDsOAxUeFF5JWBYZEEoKFBINSQcJGk4dAgUUFAk%3D, Supplier=LCSC
R15: library part Resistor, Manufacture=FH, Part Number=RS-03K1004FT, Supplier Part Number=C136593, ComponentLink1Description="New link", Footprint size=0603, Link=https://www.lcsc.com/product-detail/C136593.html?spm=wm.fly.bg.0.xh___wm.mly.mlk.28-6-1.ml&lcsc_vid=RFYMBlMFQAQLUVJeFVJZXwVeRFYIAgBXEVkPUlxRRVUxVlNRQFNYUVZQRlheVDsOAxUeFF5JWBYZEEoKFBINSQcJGk4dAgUUFAk%3D, Supplier=LCSC
R16 R17 R19 R20: library part Resistor, Manufacture=FH, Part Number=RS-03K1002FT, Supplier Part Number=C115324, ComponentLink1Description="New link", Footprint size=0603, Link=https://www.lcsc.com/product-detail/C115324.html?spm=wm.fly.bg.0.xh&lcsc_vid=RFYMBlMFQAQLUVJeFVJZXwVeRFYIAgBXEVkPUlxRRVUxVlNRQFNWVFZXQ1NWXjsOAxUeFF5JWBYZEEoKFBINSQcJGk4NBhADEA4cHktXRlhXSQwSGg0%3D, Supplier=LCSC
R18: library part Resistor, Manufacture=FH, Part Number=RS-03K1202FT, Supplier Part Number=C136587, ComponentLink1Description="New link", Footprint size=0603, Link=https://www.lcsc.com/product-detail/C136587.html?spm=wm.fly.bg.0.xh&lcsc_vid=RFYMBlMFQAQLUVJeFVJZXwVeRFYIAgBXEVkPUlxRRVUxVlNRQFNWV1FTRVJbVzsOAxUeFF5JWBYZEEoKFBINSQcJGk4NBhADEA4cHktXRlhXSQwSGg0%3D, Supplier=LCSC
R21 R23: library part Resistor, Manufacture=FH, Part Number=RS-03K103JT, Supplier Part Number=C73809, ComponentLink1Description="New link", Footprint size=0603, Link=https://www.lcsc.com/product-detail/C73809.html?spm=wm.fly.bg.0.xh&lcsc_vid=RFYMBlMFQAQLUVJeFVJZXwVeRFYIAgBXEVkPUlxRRVUxVlNRQVlaVFJeTlRfVDsOAxUeFF5JWBYZEEoKFBINSQcJGk4NBhADEA4cHktXRlhXSQwSGg0%3D, Supplier=LCSC
R22: library part Resistor, Manufacture=FH, Part Number=RS-03K102JT, Supplier Part Number=C73797, ComponentLink1Description="New link", Footprint size=0603, Link=https://www.lcsc.com/product-detail/C73797.html?spm=wm.fly.bg.0.xh&lcsc_vid=RFYMBlMFQAQLUVJeFVJZXwVeRFYIAgBXEVkPUlxRRVUxVlNRQVlaVFFSQ1NWVjsOAxUeFF5JWBYZEEoKFBINSQcJGk4NBhADEA4cHktXRlhXSQwSGg0%3D, Supplier=LCSC
R24 R25 R26 R27 R34: library part Resistor, Manufacture=YAGEO, Part Number=RC0603JR-07220RL, Supplier Part Number=C114683, ComponentLink1Description="New link", Footprint size=0603, Link=https://www.lcsc.com/product-detail/C114683.html, Supplier=LCSC
R28: library part Resistor, Manufacture=Viking, Part Number=AR03FTC1693, Supplier Part Number=C234308, ComponentLink1Description="New link", Footprint size=0603, Link=https://www.lcsc.com/product-detail/C234308.html?spm=wm.fly.bg.0.xh___wm.sy.top.tjl.8-58&lcsc_vid=EwNbUgICTlRcBlxXEQRYAgYAFVkLVwZURVRZBVcDFVcxVlNRQVZbVVZVQFVdUjsOAxUeFF5JWBYZEEoBGA4JCwFIFA4DSA%3D%3D, Supplier=LCSC
R29: library part Resistor, Manufacture=FH, Part Number=RS-03K1022FT, Supplier Part Number=C321670, ComponentLink1Description="New link", Footprint size=0603, Link=https://www.lcsc.com/product-detail/C321670.html?spm=wm.fly.bg.0.xh&lcsc_vid=EwNbUgICTlRcBlxXEQRYAgYAFVkLVwZURVRZBVcDFVcxVlNRQVZbVFNfTlZfUzsOAxUeFF5JWBYZEEoKFBINSQcJGk4NBhADEA4cHktXRlhXSQwSGg0%3D, Supplier=LCSC
R30: library part Resistor, Manufacture=FOJAN, Part Number=FRC0603F1961TS, Supplier Part Number=C2998107, ComponentLink1Description="New link", Footprint size=0603, Link=https://www.lcsc.com/product-detail/C2998107.html?spm=wm.fly.bg.1.xh&lcsc_vid=EwNbUgICTlRcBlxXEQRYAgYAFVkLVwZURVRZBVcDFVcxVlNRQVZbVF1eT1JZUjsOAxUeFF5JWBYZEEoKFBINSQcJGk4NBhADEA4cHktXRlhXSQwSGg0%3D, Supplier=LCSC
R31: library part Resistor, Manufacture=FH, Part Number=RS-03K2262FT, Supplier Part Number=C304721, ComponentLink1Description="New link", Footprint size=0603, Link=https://www.lcsc.com/product-detail/C304721.html?spm=wm.fly.bg.0.xh&lcsc_vid=EwNbUgICTlRcBlxXEQRYAgYAFVkLVwZURVRZBVcDFVcxVlNRQVZbVVFeRVlaVjsOAxUeFF5JWBYZEEoKFBINSQcJGk4NBhADEA4cHktXRlhXSQwSGg0%3D, Supplier=LCSC
R32: library part Resistor, Manufacture=FH, Part Number=RS-03K3242FT, Supplier Part Number=C304734, ComponentLink1Description="New link", Footprint size=0603, Link=https://www.lcsc.com/product-detail/C304734.html?spm=wm.fly.bg.2.xh&lcsc_vid=EwNbUgICTlRcBlxXEQRYAgYAFVkLVwZURVRZBVcDFVcxVlNRQVZbU1FfQlVZVjsOAxUeFF5JWBYZEEoKFBINSQcJGk4NBhADEA4cHktXRlhXSQwSGg0%3D, Supplier=LCSC
R33: library part Resistor, Manufacture=VISHAY, Part Number=CRCW0603470RJNEA, Supplier Part Number=C844367, ComponentLink1Description="New link", Footprint size=0603, Link=https://www.lcsc.com/product-detail/C844367.html?spm=wm.fly.bg.1.xh___wm.fly.tp.1.ml&lcsc_vid=RFYMBlMFQAQLUVJeFVJZXwVeRFYIAgBXEVkPUlxRRVUxVlNRQVdbX1ZUQVNZXzsOAxUeFF5JWBYZEEoBGA4JCwFIFA4DSA%3D%3D, Supplier=LCSC
R36 R37 R38 R39 R40 R41: library part Resistor, Manufacture=YAGEO, Part Number=RC0201FR-070RL, Supplier Part Number=C106227, ComponentLink1Description="New link", Footprint size=0201, Link=https://www.lcsc.com/product-detail/C106227.html?s_z=n_q_C106227, Supplier=LCSC
R42 R43: library part Resistor, Manufacture=YAGEO, Part Number=RC0603FR-074K7L, Supplier Part Number=C99782, ComponentLink1Description="New link", Footprint size=0603, Link=https://www.lcsc.com/product-detail/C99782.html?spm=wm.fly.bg.0.xh___wm.sxq.dhl.mly.12-6-1&lcsc_vid=RFYMBlMFQAQLUVJeFVJZXwVeRFYIAgBXEVkPUlxRRVUxVlNRT1NdV1xeQ1FZVzsOAxUeFF5JWBYZEEoKFBINSQcJGk4eFQsCAgIaSgADAwAHC0slQ1hbUldfWQkaCgg%3D, Supplier=LCSC
S3 S4: Manufacture=G-Switch, Part Number=GT-TC060A-H025-L1S, Supplier Part Number=C7450623, Footprint size=SMD,6x3mm, Link=https://www.lcsc.com/product-detail/C7450623.html, Supplier=LCSC
U1: "Bluetooth, WiFi 802.11b/g/n, Bluetooth v5.0 Transceiver Module 2.4GHz Antenna Not Included, U.FL Surface Mount", Manufacture=ESPRESSIF, Supplier Part Number=C3013944, Footprint size=SMD,19.2x18mm, Link=https://www.lcsc.com/product-detail/C3013944.html?s_z=n_q_ESP32-S3-WROOM-1U-N8R2&spm=wm.ssy.bg.0.xh&lcsc_vid=RFYMBlMFQAQLUVJeFVJZXwVeRFYIAgBXEVkPUlxRRVUxVlNRQFVaU1JRR1hdUzsOAxUeFF5JWBYZEEoKFBINSQcJGk4eFQsCAgIaSgADAwAHC0slQ1hbUldfWQkaCgg%3D, Part Number=ESP32-S3-WROOM-1U-N8R2, Supplier=LCSC
U2: Manufacture=DEALON, Part Number=USB-TYPE-C-018, Supplier Part Number=C2927038, Footprint size=SMD, Link=https://www.lcsc.com/product-detail/C2927038.html?s_z=n_q_C2927038&globalKeyword=C2927038, Supplier=LCSC
U5: "USB Hub Controller USB 2.0 USB Interface 36-QFN (6x6)", Manufacture=MICROCHIP, Part Number=USB2514BI-AEZG-TR, Supplier Part Number=C58940, Footprint size=TQFN-36-EP(6x6), Link=https://www.lcsc.com/product-detail/C58940.html?s_z=n_q_USB2514BI-AEZG-TR&spm=wm.fly.bg.0.xh&lcsc_vid=RFYMBlMFQAQLUVJeFVJZXwVeRFYIAgBXEVkPUlxRRVUxVlNRT1BZUlFWQ1JXUTsOAxUeFF5JWBYZEEoKFBINSQcJGk4eFQsCAgIaSgADAwAHC0slRVJXX1BIHxUDCw%3D%3D, Supplier=LCSC
U6: "Optocoupler DC-IN 1-CH Transistor DC-OUT 4-Pin DIP SMD T/R", Manufacture=SHARP, Part Number=PC817X3NIP1B, Supplier Part Number=C169111, Footprint size=SMD-4P, Link=https://www.lcsc.com/product-detail/C169111.html?s_z=n_q_PC817X4NIP1B&spm=wm.ssy.bg.0.xh&lcsc_vid=RFYMBlMFQAQLUVJeFVJZXwVeRFYIAgBXEVkPUlxRRVUxVlNRQVlaUVBVRVJZXzsOAxUeFF5JWBYZEEoKFBINSQcJGk4eFQsCAgIaSgADAwAHC0slRlBWVF1SWQkaCgg%3D, Supplier=LCSC
U7: "3.5V to 28V Input, 3A, 570kHz Step-Down Converter with Eco-mode", Manufacture=TI, Supplier Part Number=C9865, Footprint size=SOIC-8, Link=https://www.lcsc.com/product-detail/C9865.html?s_z=n_q_TPS54331DR&spm=wm.ssy.bg.0.xh&lcsc_vid=RFYMBlMFQAQLUVJeFVJZXwVeRFYIAgBXEVkPUlxRRVUxVlNRQFJZVVdfQlFbUzsOAxUeFF5JWBYZEEoKFBINSQcJGk4eFQsCAgIaSgADAwAHC0slRlJfVFdSWQkaCgg%3D, Part Number=TPS54331DR, Supplier=LCSC
VR1: "800-mA 15-V linear voltage regulator", Manufacture=TI, Supplier Part Number=C23984, Footprint size=SOT-223, Link=https://www.lcsc.com/product-detail/C23984.html?s_z=n_q_LM1117IMPX-3.3%252FNOPB&spm=wm.fly.bg.0.xh&lcsc_vid=RFYMBlMFQAQLUVJeFVJZXwVeRFYIAgBXEVkPUlxRRVUxVlNRT1BZUlZeT1FeVzsOAxUeFF5JWBYZEEoKFBINSQcJGk4eFQsCAgIaSgADAwAHC0slRFleVl1eWQkaCgg%3D, Part Number=LM1117IMPX-3.3/NOPB, Supplier=LCSC
Y1: "HC/49US (AT49) SMD LOW PROFILE CRYSTAL", Manufacture=ABRACON, Supplier Part Number=C5122439, Footprint size=HC-49S-SMD, Link=https://www.lcsc.com/product-detail/C5122439.html?spm=wm.fly.bg.1.xh___wm.fly.tp.1.ml&lcsc_vid=RFYMBlMFQAQLUVJeFVJZXwVeRFYIAgBXEVkPUlxRRVUxVlNRQFNZUlZTRldbXzsOAxUeFF5JWBYZEEoKFBINSQcJGk4NBhADEA4cHktXRlVcSQwSGg0%3D, Part Number=ABLS-24.000MHZ-B4-T, Supplier=LCSC

## Free pads (board coordinates)
  round 3.3 hole 3.3: 2(159.639,81.407) 3(67.437,81.407) 4(67.437,30.099) 5(159.639,29.845)

## Via types
v1: diameter 0.508, hole 0.254, Top Layer to Bottom Layer, 103 vias
v2: diameter 0.45, hole 0.2, Top Layer to Bottom Layer, 20 vias
v3: diameter 1, hole 0.5, Top Layer to Bottom Layer, 4 vias
v4: diameter 0.6, hole 0.3, Top Layer to Bottom Layer, 4 vias

## Nets (pads, with @x,y where several pads share a name; then routed paths per layer and width w, separated by ;. In a path a pad name is that pad's centre, name@x,y a point inside that pad or via, vN(x,y) a via of type N, cw(c..) or ccw(c..) an arc to the next point about the centre after c; other vN are vias at no path point)
3V3: C2.2 C3.2 C9.2 C10.2 C12.2 C15.2 C16.2 C17.2 C18.2 C19.2 C35.2 ID1.29 J2.1 R2.1 R4.2 R8.1 R11.1 R16.1 R17.1 R19.1 R20.1 R24.1 R25.1 R26.1 R27.1 R34.1 R42.2 R43.2 U1.2 U5.5 U5.10 U5.15 U5.23 U5.29 U5.36 U6.4 VR1.2 | length 372
  Top Layer w0.156: C15.2@92.583,52.832 C17.2@94.615,52.832 C16.2@96.647,52.832 C19.2@96.647,50.537 ; U1.2@93.896,66.045 U1.2@94.004,66.153 ; R20.1@94.5,37.846 R19.1@94.5,40.386 R17.1@94.5,43.138 R16.1@94.5,45.72 94.629,45.849 94.629,46.369 94.83,46.57 97.37,46.57 98.596,47.796 U5.5@99.649,47.796 ; C18.2@94.54,50.462 C19.2@96.572,50.462 C19.2@96.647,50.537 ; U5.36@100.469,50.616 96.726,50.616 C19.2@96.647,50.537 ; U5.15@102.969,44.976 102.969,43.822 103.303,43.488 C9.2@103.303,42.461 C10.2@105.208,42.461 105.267,42.52 v1(106.578,42.52) 106.646,42.452 108.779,42.452 109.83,41.402 R42.2@109.83,39.561 ; U5.29@103.969,50.616 104.007,50.654 104.007,51.265 104.255,51.513 105.638,51.513 106.957,52.832 v1(107.036,52.832) 108.179,52.832 108.47,52.54 R8.1@108.47,51.296 ; U5.23@105.289,47.796 106.465,47.796 107.142,47.12 C12.2@108.204,47.12 ; C12.2@108.254,47.12 108.511,46.863 v1(109.5,46.863) 110.49,46.863 R11.1@110.744,46.609
  Top Layer w0.254: v1(87.427,65.688) R4.2@87.427,67.857 ; v1(93.878,60.122) C2.2@93.878,61.78 ; C2.2@93.896,61.797 C3.2@93.896,63.575 U1.2@93.896,66.045 ; U5.10@100.458,44.976 100.458,44.306 100.459,44.305 100.459,43.762 v1(100.508,43.713) ; R2.1@112.903,65.786 112.954,65.735 v1(114.192,65.735) ; R25.1@126.958,46.33 R24.1@130.09,46.33 R27.1@133.223,46.33 R26.1@136.356,46.33 136.347,46.339 136.347,47.498 v1(138.735,49.886) ; J2.1@145.018,80.924 145.039,80.903 145.039,78.888 v1(145.059,78.867) ; U6.4@159.232,50.034 159.262,50.063 v1(161.671,50.063)
  Top Layer w0.508: R43.2@84.226,40.298 84.226,42.189 87.655,45.618 v1(92.939,45.618) 94.399,45.618 R16.1@94.5,45.72 ; R4.2@87.427,67.857 R4.2@87.515,67.945 ; C2.2@93.878,61.78 C2.2@93.896,61.797
  Layer 2 w0.508: ID1.29@76.962,32.131 73.355,32.131 72.568,31.344 72.568,27.425 72.865,27.127 133.655,27.127 144.297,37.77 v1(144.297,42.367) ; v1(92.211,51.587) 92.211,58.454 v1(93.878,60.122) ; v1(92.338,50.083) 92.939,49.483 v1(92.939,45.618) 94.844,43.713 v1(100.508,43.713) 101.702,42.52 v1(106.578,42.52) 109.5,45.442 v1(109.5,46.863) ; v1(114.192,65.735) 112.928,64.471 112.928,61.417 107.036,55.524 v1(107.036,52.832) 108.331,52.832 108.884,52.279 108.884,50.018 109.5,49.402 v1(109.5,46.863) ; v1(138.735,49.886) 138.735,45.72 139.319,45.136 141.529,45.136 v1(144.297,42.367) ; v1(145.059,78.867) 158.344,78.867 162.56,74.651 162.56,50.952 v1(161.671,50.063) ; v1(109.5,46.863) 113.996,42.367 v1(144.297,42.367)
  Bottom Layer w0.156: VR1.2@139.552,44.081 139.763,44.292 C35.2@142.546,44.292 R34.1@144.876,44.292
  Bottom Layer w0.254: v1(87.427,65.688) 92.993,60.122 v1(93.878,60.122) ; v1(144.297,42.367) 144.876,42.946 R34.1@144.876,44.292 ; 144.907,43.464 145.089,43.282 158.928,43.282 161.671,46.025 v1(161.671,50.063)
  other v1: 91.135,50.09 91.135,51.587
5V: C1.2 C6.1 C8.1 C27.2 C28.2 C34.2 D1.1 D7.1 ID1.25 J1.1 K1.2 K1.5 l1.2 R29.1 R33.1 U3.2 U3.11 U4.2 U4.11 VR1.3 X1.14 | length 305.2
  Top Layer w0.156: C6.1@144.451,68.747 144.773,69.069 147.656,69.069 U4.2@147.701,69.113
  Top Layer w0.254: v1(71.831,54.432) 73.371,54.432 D1.1@73.472,54.533 75.483,54.533 C1.2@75.744,54.272 ; C8.1@130.148,55.586 131.861,55.586 132.51,56.236 U3.2@132.791,56.236 ; v1(134.239,78.892) J1.1@134.239,80.9 ; D7.1@147.012,33.118 148.695,33.118 148.912,32.901 151.9,32.901 K1.2@153.035,34.036
  Top Layer w0.762: X1.14@68.007,77.521 68.047,77.56 v1(68.047,78.435)
  Layer 2 w1.016: ID1.25@82.042,32.131 82.042,36.424 74.905,43.561 74.905,51.359 v1(71.831,54.432) 67.97,58.293 67.97,78.359 v1(68.047,78.435) 70.485,80.874 132.258,80.874 v1(134.239,78.892) 135.382,78.892 140.081,74.193 ; U3.11@120.151,66.396 121.945,66.396 ; v1(122.174,44.658) 122.115,44.717 122.115,45.559 U3.2@132.791,56.236 127.432,56.236 125.247,58.42 125.247,63.17 122.022,66.396 121.945,66.396 ; U4.2@147.701,69.113 145.161,69.113 140.081,74.193 ; U4.2@147.723,69.091 152.752,69.091 155.321,66.523 155.321,60.503 156.87,58.953 U4.11@160.341,58.953 ; 121.945,66.396 123.876,68.326 125.959,68.326 131.826,74.193 140.081,74.193
  Bottom Layer w0.156: C27.2@116.84,43.307 118.996,43.307 C28.2@118.999,43.304 ; 122.085,45.715 122.037,45.666 121.843,45.666 120.763,44.586 120.763,44.384 119.684,43.304 C28.2@118.999,43.304 ; 122.992,43.129 123.065,43.202 123.065,44.096 123.114,44.145 ; R29.1@123.698,34.405 123.698,34.428 119.898,38.228 l1.2@119.898,40.17 118.999,41.068 C28.2@118.999,43.304
  Bottom Layer w0.254: 122.085,45.715 122.167,45.715 ; R33.1@122.167,46.646 122.167,45.715 ; 122.992,43.129 122.992,44.921 122.199,45.715 122.167,45.715 ; 123.114,44.145 128.727,44.145 131.091,41.781 VR1.3@139.552,41.781 142.245,41.781 C34.2@142.442,41.584 153.818,41.584 154.737,40.665 154.737,37.948 153.035,36.246 K1.2@153.035,34.036 K1.5@160.655,34.036
19V: C5.1 C7.1 C29.2 C30.2 ID1.14 J5.2 R28.1 U3.8 U4.8 U7.2 | length 139.7
  Top Layer w0.156: C7.1@138.953,71.476 C7.1@139.446,71.969
  Top Layer w0.254: v1(121.666,30.632) 121.67,30.628 121.67,29.211 J5.2@121.674,29.207 ; U3.8@132.791,71.476 C7.1@138.953,71.476 ; C5.1@142.024,53.873 U4.8@147.701,53.873
  Top Layer w0.762: C5.1@141.605,54.523 141.605,54.292 C5.1@142.024,53.873
  Layer 2 w0.762: U3.8@132.791,71.476 137.998,71.476 140.246,69.228 140.246,56.502 142.875,53.873 U4.8@147.701,53.873 147.701,36.322 145.694,34.315 v1(143.967,34.315)
  Bottom Layer w0.156: ID1.14@97.282,29.591 97.282,27.254 97.961,26.575 118.72,26.575 144.05,26.575 145.796,28.321 145.796,31.91 145.704,32.002 144.012,32.002 143.967,32.046 v1(143.967,34.315) ; U7.2@136.455,31.623 137.14,31.623 137.509,31.992 R28.1@138.938,31.992 141.244,31.992 C30.2@141.351,32.099 141.418,32.032 C29.2@143.982,32.032
  Bottom Layer w0.254: v1(118.72,26.111) 118.72,26.575 118.72,27.686 v1(121.666,30.632)
BL_1: ID1.9 U1.8 | length 35.4
  Top Layer w0.156: v1(101.6,64.643) 101.6,66.129 U1.8@101.624,66.153
  Bottom Layer w0.156: v1(101.6,64.643) 100.381,63.424 100.381,45.593 102.362,43.612 ID1.9@102.362,32.131
BL_2: ID1.7 U1.9 | length 34.9
  Top Layer w0.156: v1(102.87,64.643) 102.87,66.129 U1.9@102.894,66.153
  Bottom Layer w0.156: v1(102.87,64.643) 102.87,52.303 104.902,50.271 ID1.7@104.902,32.131
BLE_LED: R35.2 U1.11 | length 41.6
  Top Layer w0.156: v1(105.292,64.643) 105.292,65.481 U1.11@105.434,66.153 ; v1(129.489,77.216) R35.2@131.533,77.216
  Layer 2 w0.108: v1(105.292,64.643) 105.292,75.828 109.141,79.677 127.029,79.677 129.467,77.239 v1@129.543,77.239
D_N: D3.1 R36.1 R38.1 U2.A7 U2.B7 | length 18.4
  Top Layer w0.139: U2.A7@71.195,46.529 71.221,46.555 71.979,46.555 72.169,46.745 72.169,47.313 71.979,47.502 71.222,47.502 U2.B7@71.195,47.529 ; 71.979,46.502 71.994,46.488 72.064,46.488 72.343,46.488 73.264,46.488 73.346,46.57 73.346,46.764 D3.1@73.476,46.894 73.606,46.764 73.606,46.57 73.688,46.488 76.004,46.488 76.385,46.869 78.785,46.869 78.867,46.951 v2(78.867,47.371) R36.1@80.162,47.371 ; v2@78.994,43.135 78.994,43.173 79.011,43.19 R38.1@80.162,43.19
  Bottom Layer w0.139: v2(78.867,43.135) 78.867,43.578 78.785,43.659 78.56,43.659 78.167,44.052 78.167,46.476 78.56,46.869 78.785,46.869 78.867,46.951 v2(78.867,47.371)
D_P: D4.1 R37.1 R39.1 U2.A6 U2.B6 | length 18.3
  Top Layer w0.139: U2.A6@71.195,47.029 71.169,47.003 70.411,47.003 70.222,46.813 70.222,46.245 70.411,46.055 71.169,46.055 U2.B6@71.195,46.029 71.222,46.055 71.979,46.055 72.146,46.222 72.453,46.222 73.251,46.222 73.333,46.14 73.333,45.946 D4.1@73.463,45.816 ; D4.1@73.476,45.816 73.606,45.946 73.606,46.14 73.688,46.222 76.114,46.222 76.495,46.603 78.785,46.603 78.867,46.521 v2(78.867,46.101) 78.9,46.068 80.128,46.068 R37.1@80.162,46.036 ; v2@78.994,44.45 78.999,44.455 80.157,44.455 R39.1@80.162,44.46
  Bottom Layer w0.139: v2(78.867,44.45) 78.867,44.007 78.785,43.926 78.67,43.926 78.433,44.163 78.433,46.366 78.67,46.603 78.785,46.603 78.867,46.521 v2(78.867,46.101)
EN: C4.2 D5.1 R4.1 S4.2 U1.3 | length 18.1
  Top Layer w0.156: S4.2@88.631,74.497 89.46,74.497 89.637,74.32 89.637,70.619 C4.2@89.451,70.433 89.451,68.127 89.154,67.83 v2(89.154,65.659) ; U1.3@95.274,66.153 95.274,64.825 95.377,64.722 v2@95.377,64.643
  Bottom Layer w0.156: v2(89.154,65.659) 90.17,64.643 v2@95.377,64.643
  other v2: 95.377,64.672
ESP1_D_N: R41.1 U5.1 | length 21.2
  Top Layer w0.139: v2(86.31,54.326) 86.317,54.318 86.744,54.318 87.306,54.881 87.306,55.798 87.225,55.88 R41.1@86.868,55.88 ; v2(88.78,52.304) 89.092,51.991 89.092,49.689 90.636,48.145 97.045,48.145 98.508,49.609 98.862,49.609 99.003,49.75 99.603,49.75 U5.1@99.649,49.796
  Bottom Layer w0.139: v2(86.31,54.326) 86.317,54.318 86.748,54.318 86.855,54.425 87.191,54.425 87.446,54.171 87.446,53.927 87.856,53.517 87.856,52.795 88.346,52.304 v2(88.78,52.304)
ESP1_D_P: R40.1 U5.2 | length 21
  Top Layer w0.139: v2(86.741,53.77) 86.8,53.829 86.8,53.999 87.573,54.771 87.573,55.798 87.654,55.88 R40.1@88.011,55.88 ; v2(88.392,51.562) 88.451,51.503 88.607,51.503 88.826,51.284 88.826,49.579 90.526,47.879 97.155,47.879 98.618,49.342 98.944,49.342 99.603,49.342 U5.2@99.649,49.296
  Bottom Layer w0.139: v2(86.741,53.77) 86.741,53.854 86.858,53.971 86.858,54.052 86.965,54.159 87.081,54.159 87.179,54.061 87.179,53.817 87.589,53.407 87.589,52.684 88.08,52.194 88.08,51.874 v2(88.392,51.562)